# Altium PCB PCB1.PcbDoc
Units mil, origin at the board's own origin, x right, y up, seen from the top; angles counter-clockwise.
Board outline 4433.75 x 2440 mil, 2 copper layers (Top Layer, Bottom Layer); 83 components, 118 nets, 440 pads, 174 vias.
Unrouted connection lines stored in the file: 1.
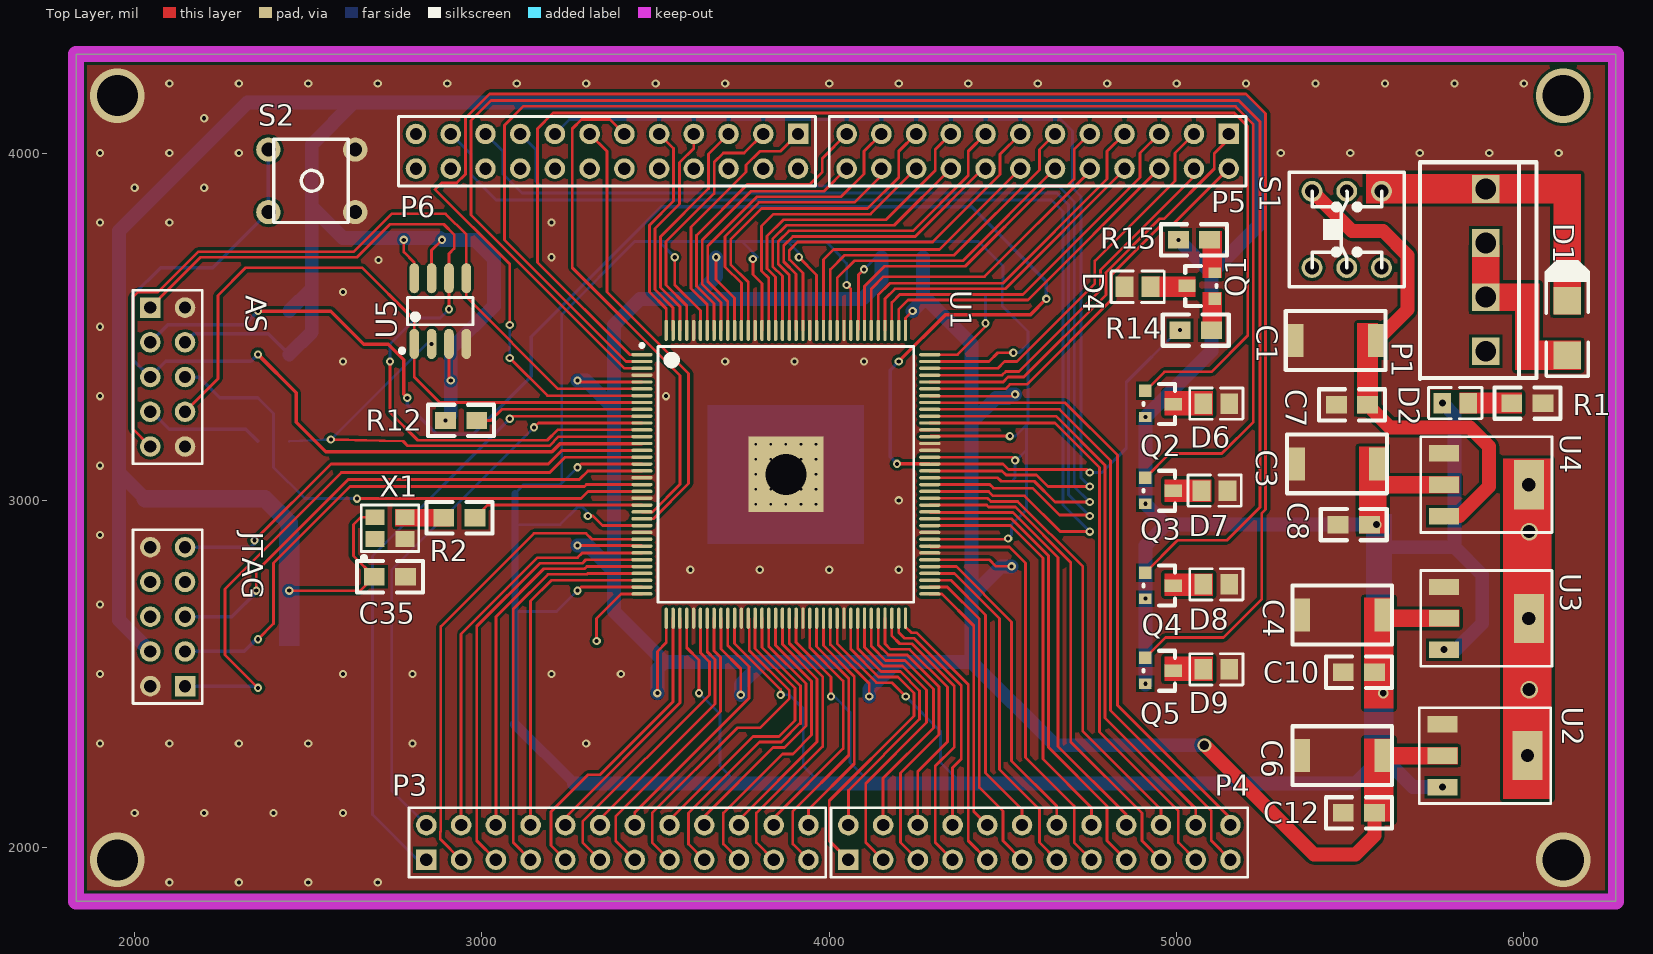
[diagram p0: Top Layer view]
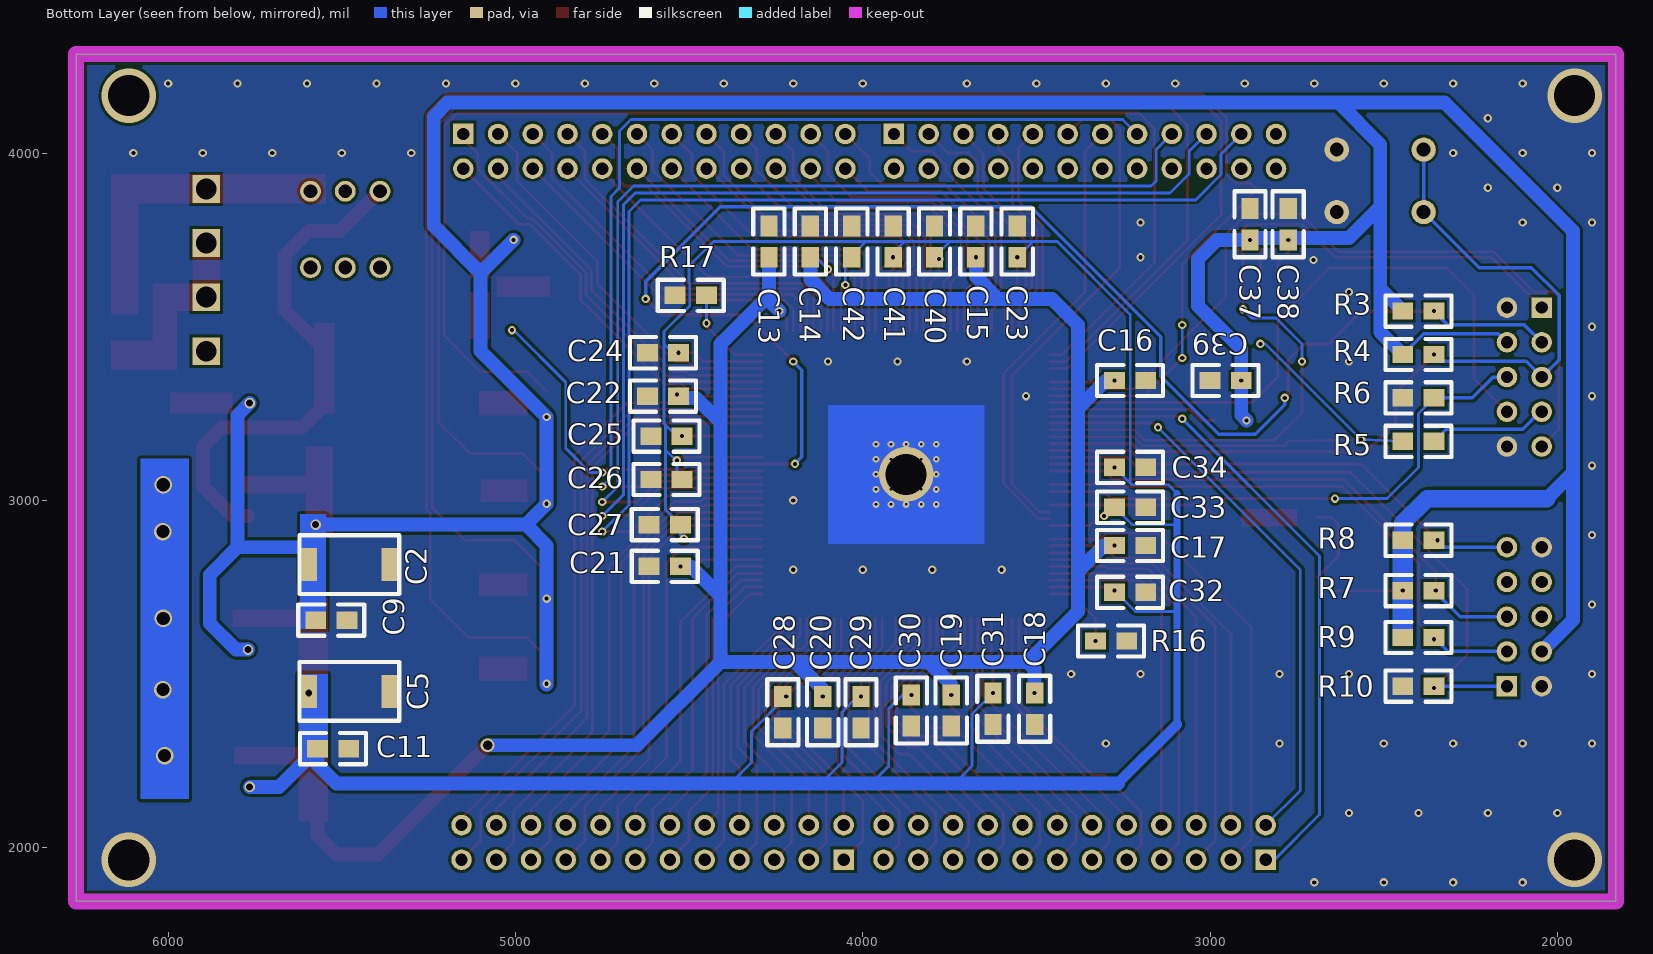
[diagram p1: Bottom Layer view, seen from below]

## Layer stack, top to bottom
Top Solder: solder mask 0.4, Solder Resist, Dk 3.5
Top Layer: signal copper 1.4
Dielectric 1: dielectric 12.6, FR-4, Dk 4.8
Bottom Layer: signal copper 1.4
Bottom Solder: solder mask 0.4, Solder Resist, Dk 3.5

## Board outline
1831.25,1845 1831.25,4285 6265,4285 6265,1845

## Design rules (kind name [scope] priority, off if disabled: settings)
Clearance [All] p1: gap=8
PlaneConnect [All] p1: planeconnectstyle=Direct reliefexpansion=20 reliefentries=4 reliefconductorwidth=10 reliefairgap=10
PolygonConnect [All] p1: connectstyle=Direct reliefconductorwidth=10 reliefentries=4 polygonreliefangle="90 Angle" airgapwidth=10
RoutingVias [All] p1: holewidth=28 width=50 viastyle="Through Hole" minholewidth=28 minwidth=50 maxholewidth=28 maxwidth=50
SolderMaskExpansion [All] p1: expansion=4
Width [All] p1: maxlimit=50 minlimit=8 preferedwidth=10
29 further rules are at their usual default settings.

## Components (designator, comment, footprint, x,y, rotation, side; value= is the part's Value field where it differs from the comment)
AS "Header 5X2" HDR2X5 2045,3555 r270 top
C1 "Cap" "7343-31 TYPE D" 5601.81,3544.65 r180 top
C2 "Cap" "7343-31 TYPE D" 5621.81,2730.35 r180 bottom
C3 "Cap" "7343-31 TYPE D" 5605.59,3189.65 r180 top
C4 "Cap" "7343-31 TYPE D" 5620.59,2754.65 r180 top
C5 "Cap" "7343-31 TYPE D" 5621.81,2365.35 r180 bottom
C6 "Cap" "7343-31 TYPE D" 5620.59,2349.65 r180 top
C7 "0.1uf" 0805 5460,3275 r0 top
C8 "0.1uf" 0805 5465,2930 r0 top
C9 "0.1uf" 0805 5485,2655 r0 bottom
C10 "0.1uf" 0805 5480,2505 r0 top
C11 "0.1uf" 0805 5480,2285 r0 bottom
C12 "0.1uf" 0805 5480,2100 r0 top
C13 "0.1uf" 0805 4270,3790 r270 bottom
C14 "0.1uf" 0805 4150.83,3790 r270 bottom
C15 "0.1uf" 0805 3674.17,3790 r270 bottom
C16 "0.1uf" 0805 3185,3345 r0 bottom
C17 "0.1uf" 0805 3185,2870 r0 bottom
C18 "0.1uf" 0805 3505,2355 r90 bottom
C19 "0.1uf" 0805 3745,2350 r90 bottom
C20 "0.1uf" 0805 4115,2345 r90 bottom
C21 "0.1uf" 0805 4615,2810 r180 bottom
C22 "0.1uf" 0805 4620,3300 r180 bottom
C23 "0.1uf" 0805 3555,3790 r270 bottom
C24 "0.1uf" 0805 4620,3425 r180 bottom
C25 "0.1uf" 0805 4610,3185 r180 bottom
C26 "0.1uf" 0805 4610,3060 r180 bottom
C27 "0.1uf" 0805 4615,2930 r180 bottom
C28 "0.1uf" 0805 4230,2345 r90 bottom
C29 "0.1uf" 0805 4005,2345 r90 bottom
C30 "0.1uf" 0805 3860,2350 r90 bottom
C31 "0.1uf" 0805 3625,2355 r90 bottom
C32 "0.1uf" 0805 3185,2735 r0 bottom
C33 "0.1uf" 0805 3185,2980 r0 bottom
C34 "0.1uf" 0805 3185,3095 r0 bottom
C35 "104" 0805 2780,2780 r180 top
C37 "104" 0805 2885,3750 r90 bottom
C38 "104" 0805 2775,3840 r270 bottom
C39 "104" 0805 2910,3345 r0 bottom
C40 "0.1uf" 0805 3793.33,3790 r270 bottom
C41 "0.1uf" 0805 3912.5,3790 r270 bottom
C42 "0.1uf" 0805 4031.67,3790 r270 bottom
D1 "5.6V" SMA/DO-214AC 6125,3417.52 r90 top
D2 "LED" 0805_s 5823.07,3293.78 r0 top
D4 "LED" 0805_s 4866.93,3601.22 r180 top
D6 "LED" 0805_s 5135,3292 r0 top
D7 "LED" 0805_s 5130,3042 r0 top
D8 "LED" 0805_s 5135,2772 r0 top
D9 "LED" 0805_s 5135,2527 r0 top
JTAG "Header 5X2" HDR2X5 2145,2465 r90 top
P1 "VH3.96-4A" VH3.96-4P 6035.67,3973.58 r270 top
P3 "Header 12X2" HDR2X12 2840,1965 r0 top
P4 "Header 12X2" HDR2X12 4055,1965 r0 top
P5 "Header 12X2" HDR2X12 5150,4055 r180 top
P6 "Header 12X2" HDR2X12 3910,4055 r180 top
Q1 "SI2301" SOT-23 4989.72,3532.24 r90 top
Q2 "SI2301" SOT-23 5030.28,3362.76 r270 top
Q3 "SI2301" SOT-23 5030.28,3112.76 r270 top
Q4 "SI2301" SOT-23 5030.28,2839.76 r270 top
Q5 "SI2301" SOT-23 5030.28,2594.76 r270 top
R1 "1K" 0805 6055,3280 r180 top
R2 "30R" 0805 2890,2950 r0 top
R3 "10K" 0805 2445,3545 r180 bottom
R4 "10K" 0805 2445,3420 r180 bottom
R5 "20R" 0805 2445,3170 r180 bottom
R6 "20R" 0805 2445,3295 r180 bottom
R7 "10K" 0805 2355,2740 r0 bottom
R8 "10K" 0805 2355,2885 r0 bottom
R9 "10K" 0805 2355,2605 r0 bottom
R10 "10K" 0805 2355,2465 r0 bottom
R12 "10K" 0805 2985,3230 r180 top
R14 "10K" 0805 5010,3490 r0 top
R15 "1K" 0805 5095,3750 r180 top
R16 "0" 0805 3240,2595 r0 bottom
R17 "0" 0805 4540,3590 r180 bottom
S1 "自锁开关" AN88 5490,3780 r90 top
S2 "6x6开关" AN66 2510,3920 r270 top
U1 "FPGA-ALEP4C-EP4CE10-E144" EQFP144_A-165_D2-54_L 3875,3075 r0 top
U2 "AMS1117-1.2V" SOT223 5765.9,2355.55 r270 top
U3 "AMS1117-2.5V" SOT223 5770,2750.55 r270 top
U4 "AMS1117-3.3V" SOT223 5770,3135.55 r270 top
U5 "W25Q64" LC-SOIC-8_150mil 2880,3545 r0 top
X1 "XAL" XAL-SMD-3225_4P 2735,2920 r0 top

## Footprints (in the part's own frame and the unit in brackets; to place one, negate y for a bottom-side part, rotate by r counter-clockwise, add the part's x,y. Pads: shape width x height; smd on the part's side, far side on the other; paste and mask are expansions set on the pad)
0805 [mil]
  rect 60x50 smd: 1(0,0) 2(90,0)
  silkscreen extent -50,-45 140,45
0805_s [mm]
  rect 1.3x1.499 smd: 1(0.425,-0.35) 2(-1.475,-0.35)
  silkscreen extent -2.47,-1.49 1.43,0.79
"7343-31 TYPE D" [mm]
  rect 1.3x2.4 smd: 1(0.65,2.15) 2(6.65,2.15)
  silkscreen extent 0,0 7.3,4.3
AN66 [mil]
  round 70 hole 40: 1(-90,125) 1(90,125) 2(-90,-125) 2(90,-125)
  silkscreen extent -120,-110 120,105
AN88 [mil]
  round 60 hole 40: 1(-110,100) 2(-110,0) 3(-110,-100) 4(110,-100) 5(110,0) 6(110,100)
  silkscreen extent -165,-165 165,165
EQFP144_A-165_D2-54_L [mm] "Shrink QFP, 144-Leads, Body 20x20mm, Pitch 0.5mm, Thermal Pad 5.55x5.55mm, IPC High Density"
  oval 1.55x0.25 smd: 1(-10.525,8.75) 2(-10.525,8.25) 3(-10.525,7.75) 4(-10.525,7.25) 5(-10.525,6.75) 6(-10.525,6.25) 7(-10.525,5.75) 8(-10.525,5.25) 9(-10.525,4.75) 10(-10.525,4.25) 11(-10.525,3.75) 12(-10.525,3.25) 13(-10.525,2.75) 14(-10.525,2.25) 15(-10.525,1.75) 16(-10.525,1.25) 17(-10.525,0.75) 18(-10.525,0.25) 19(-10.525,-0.25) 20(-10.525,-0.75) 21(-10.525,-1.25) 22(-10.525,-1.75) 23(-10.525,-2.25) 24(-10.525,-2.75) 25(-10.525,-3.25) 26(-10.525,-3.75) 27(-10.525,-4.25) 28(-10.525,-4.75) 29(-10.525,-5.25) 30(-10.525,-5.75) 31(-10.525,-6.25) 32(-10.525,-6.75) 33(-10.525,-7.25) 34(-10.525,-7.75) 35(-10.525,-8.25) 36(-10.525,-8.75) 73(10.525,-8.75) 74(10.525,-8.25) 75(10.525,-7.75) 76(10.525,-7.25) 77(10.525,-6.75) 78(10.525,-6.25) 79(10.525,-5.75) 80(10.525,-5.25) 81(10.525,-4.75) 82(10.525,-4.25) 83(10.525,-3.75) 84(10.525,-3.25) 85(10.525,-2.75) 86(10.525,-2.25) 87(10.525,-1.75) 88(10.525,-1.25) 89(10.525,-0.75) 90(10.525,-0.25) 91(10.525,0.25) 92(10.525,0.75) 93(10.525,1.25) 94(10.525,1.75) 95(10.525,2.25) 96(10.525,2.75) 97(10.525,3.25) 98(10.525,3.75) 99(10.525,4.25) 100(10.525,4.75) 101(10.525,5.25) 102(10.525,5.75) 103(10.525,6.25) 104(10.525,6.75) 105(10.525,7.25) 106(10.525,7.75) 107(10.525,8.25) 108(10.525,8.75)
  oval 0.25x1.55 smd: 37(-8.75,-10.525) 38(-8.25,-10.525) 39(-7.75,-10.525) 40(-7.25,-10.525) 41(-6.75,-10.525) 42(-6.25,-10.525) 43(-5.75,-10.525) 44(-5.25,-10.525) 45(-4.75,-10.525) 46(-4.25,-10.525) 47(-3.75,-10.525) 48(-3.25,-10.525) 49(-2.75,-10.525) 50(-2.25,-10.525) 51(-1.75,-10.525) 52(-1.25,-10.525) 53(-0.75,-10.525) 54(-0.25,-10.525) 55(0.25,-10.525) 56(0.75,-10.525) 57(1.25,-10.525) 58(1.75,-10.525) 59(2.25,-10.525) 60(2.75,-10.525) 61(3.25,-10.525) 62(3.75,-10.525) 63(4.25,-10.525) 64(4.75,-10.525) 65(5.25,-10.525) 66(5.75,-10.525) 67(6.25,-10.525) 68(6.75,-10.525) 69(7.25,-10.525) 70(7.75,-10.525) 71(8.25,-10.525) 72(8.75,-10.525) 109(8.75,10.525) 110(8.25,10.525) 111(7.75,10.525) 112(7.25,10.525) 113(6.75,10.525) 114(6.25,10.525) 115(5.75,10.525) 116(5.25,10.525) 117(4.75,10.525) 118(4.25,10.525) 119(3.75,10.525) 120(3.25,10.525) 121(2.75,10.525) 122(2.25,10.525) 123(1.75,10.525) 124(1.25,10.525) 125(0.75,10.525) 126(0.25,10.525) 127(-0.25,10.525) 128(-0.75,10.525) 129(-1.25,10.525) 130(-1.75,10.525) 131(-2.25,10.525) 132(-2.75,10.525) 133(-3.25,10.525) 134(-3.75,10.525) 135(-4.25,10.525) 136(-4.75,10.525) 137(-5.25,10.525) 138(-5.75,10.525) 139(-6.25,10.525) 140(-6.75,10.525) 141(-7.25,10.525) 142(-7.75,10.525) 143(-8.25,10.525) 144(-8.75,10.525)
  rect 5.5x5.5 smd: 145(0,0)
  silkscreen extent -10.65,-9.35 9.35,9.55, body extent -10,-10 10,10, height 1.65
HDR2X5 [mm] "Connector; Header; 5x2 Position"
  rect 1.5x1.5 hole 0.9: 1(0,0)
  round 1.5 hole 0.9: 2(0,2.54) 3(2.54,0) 4(2.54,2.54) 5(5.08,0) 6(5.08,2.54) 7(7.62,0) 8(7.62,2.54) 9(10.16,0) 10(10.16,2.54)
  silkscreen extent -1.27,-1.27 11.43,3.81
HDR2X12 [mm] "Connector; Header; 12x2 Position"
  rect 1.5x1.5 hole 0.9: 1(0,0)
  round 1.5 hole 0.9: 2(0,2.54) 3(2.54,0) 4(2.54,2.54) 5(5.08,0) 6(5.08,2.54) 7(7.62,0) 8(7.62,2.54) 9(10.16,0) 10(10.16,2.54) 11(12.7,0) 12(12.7,2.54) 13(15.24,0) 14(15.24,2.54) 15(17.78,0) 16(17.78,2.54) 17(20.32,0) 18(20.32,2.54) 19(22.86,0) 20(22.86,2.54) 21(25.4,0) 22(25.4,2.54) 23(27.94,0) 24(27.94,2.54)
  silkscreen extent -1.27,-1.27 29.21,3.81
LC-SOIC-8_150mil [mm]
  oval 0.7x2.2 smd: 1(-1.905,-2.4) 2(-0.635,-2.4) 3(0.635,-2.4) 4(1.905,-2.4) 5(1.905,2.4) 6(0.635,2.4) 7(-0.635,2.4) 8(-1.905,2.4)
  silkscreen extent -2.95,-3.05 2.4,1
SMA/DO-214AC [mm]
  rect 2x2 smd: 1(0,0) 2(4,0)
  silkscreen extent -1.52,-1.52 6.86,1.55
SOT223 [mm]
  rect 1.2x2.2 smd: 1(0,0) 2(2.3,0) 3(4.6,0)
  rect 3.6x2.2 smd: 4(2.3,6.2)
  silkscreen extent -1.2,-1.7 5.8,7.9
SOT-23 [mil]
  rect 36x36 smd: 1(47.76,-120.28)
  rect 30x36 smd: 2(122.76,-120.28)
  rect 36x50 smd: 3(85.76,-40.28)
  silkscreen extent 28,-125 143,-35
VH3.96-4P [mil]
  rect 80x80 hole 60: 1(76.77,-145.67) 2(232.68,-145.67) 3(388.58,-145.67) 4(544.49,-145.67)
  silkscreen extent 0,-335 625,0
XAL-SMD-3225_4P [mm]
  rect 1.4x1.15 smd: 1(-1.1,-0.8) 2(1.1,-0.8) 3(1.1,0.8) 4(-1.1,0.8)
  silkscreen extent -2.1,-2.35 2.1,1.7, body extent -1.6,-1.25 1.6,1.25, height 0.61

## Part data
AS JTAG: "Header, 5-Pin, Dual row"
C1 C2 C3 C4 C5 C6: library part "Tantalium Cap"
C7 C8 C9 C10 C11 C12 C13 C14 C15 C16 C17 C18 C19 C20 C21 C22 C23 C24 C25 C26 C27 C28 C29 C30 C31 C32 C33 C34 C35 C37 C38 C39 C40 C41 C42: library part Cap
D1: library part 肖特基-5.6V
P3 P4 P5 P6: "Header, 12-Pin, Dual row"
R1 R2 R3 R4 R5 R6 R7 R8 R9 R10 R12 R14 R15 R16 R17: library part Res

## Via types
v1: diameter 24, hole 12, Top Layer to Bottom Layer, 133 vias
v2: diameter 19.68, hole 7.87, Top Layer to Bottom Layer, 25 vias
v3: diameter 50, hole 38, Top Layer to Bottom Layer, 5 vias
v4: diameter 157.48, hole 118.11, Top Layer to Bottom Layer, 5 vias
v5: diameter 30, hole 20, Top Layer to Bottom Layer, 5 vias
v6: diameter 40, hole 28, Top Layer to Bottom Layer, 1 vias

## Nets (pads, with @x,y where several pads share a name; then routed paths per layer and width w, separated by ;. In a path a pad name is that pad's centre, name@x,y a point inside that pad or via, vN(x,y) a via of type N, cw(c..) or ccw(c..) an arc to the next point about the centre after c; other vN are vias at no path point)
1.2V: C6.1 C12.2 C13.2 C14.2 C15.2 C16.2 C17.2 C18.2 C19.2 C20.2 C21.2 C22.2 U1.5 U1.29 U1.37 U1.45 U1.61 U1.78 U1.102 U1.109 U1.116 U1.134 U2.2 | length 8798.1
  Top Layer w8: v1(3275,2870) 3458.94,2870 U1.29 ; v1(3275,3345) 3279.25,3340.75 U1.5 ; v1(3505,2445) 3505,2565 3530.51,2590.51 U1.37 ; v1(3674.17,3700) 3674.17,3635.83 3727.36,3582.64 U1.134 ; U1.45 3687.99,2572.01 3745,2515 v1(3745,2440) ; U1.61 4002.95,2584.93 4115,2472.88 v1(4115,2435) ; U1.116 4084.46,3492.13 4084.46,3649.46 v1(4100,3665) ; U1.109 4219.49,3524.49 v1(4240,3545) ; U1.78 4461.06,2828.94 4480,2810 v1(4525,2810) ; U1.102 4290.75,3300 4530,3300 v1(4535,3305)
  Top Layer w40: v6(5080,2295) 5395,1980 5515,1980 5570,2035 C12.2
  Bottom Layer w8: v1(4100,3665) 4135,3700 C14.2
  Bottom Layer w40: v1(3275,2870) 3305,2870 3380,2795 ; v1(3275,3345) 3300,3345 3380,3265 ; v1(3505,2445) 3505,2515 3525,2535 ; v1(3674.17,3700) 3674.17,3644.17 3610,3580 ; v1(3745,2440) 3745,2470 3810,2535 ; v1(4115,2435) 4115,2455 4195,2535 ; C14.2 4150.83,3635.83 4095,3580 3610,3580 ; v1(4240,3545) 4270,3575 4270,3590 ; C13.2 4270,3590 ; v1(4525,2810) 4495,2810 4410,2725 ; v1(4535,3305) 4525,3305 4515,3295 4480,3295 4410,3225 ; v6(5080,2295) 4650,2295 4410,2535 ; 3380,2795 3380,3265 ; 3380,2795 3380,2680 3525,2535 ; 3380,3265 3380,3505 3455,3580 3610,3580 ; 3525,2535 3810,2535 ; 3810,2535 4195,2535 ; 4195,2535 4410,2535 ; 4270,3590 4410,3450 4410,3225 ; 4410,2535 4410,2725 ; 4410,2725 4410,3225
2.5V: C4.1 C5.1 C10.2 C11.2 C23.2 C24.2 C25.2 C26.2 C27.2 C28.2 C29.2 C30.2 C31.2 C32.2 C33.2 C34.2 C40.2 C41.2 C42.2 U1.17 U1.26 U1.35 U1.40 U1.47 U1.56 U1.62 U1.81 U1.93 U1.96 U1.107 U1.117 U1.122 U1.130 U1.139 U2.3 U3.2 | length 12127.9
  Top Layer w8: v1(3275,2740) 3285.2,2750.2 U1.35 ; v1(3275,3095) 3285,3105 3460.16,3105 U1.17 ; v1(3305,2955) 3319.72,2955 3347.36,2927.36 U1.26 ; v1(3555,3700) 3555,3620 3628.94,3546.06 U1.139 ; U1.40 3589.57,2575.43 3625,2540 v1(3625,2445) ; U1.47 3727.36,2587.64 3860,2455 v1(3860,2440) ; v1(3780,3695) 3780,3650 3806.1,3623.9 U1.130 ; U1.56 3904.53,2591.49 4005,2491.02 v1(4005,2435) ; v1(3912.5,3700) 3963.58,3648.92 U1.122 ; U1.62 4022.64,2587.87 4135.51,2475 4180,2475 v1(4220,2435) ; v1(4050,3620) 4062.01,3607.99 U1.117 ; U1.81 4512.99,2887.99 4510.98,2890 v1(4515,2890) ; U1.93 4525.79,3124.21 v1(4535,3115) ; U1.96 4291.1,3185 v1(4520,3185) ; U1.107 4459.8,3399.8 4485,3425 v1(4530,3425)
  Bottom Layer w8: 3095,2680 3215,2680 v1(3275,2740) ; 3095,2930 3225,2930 C33.2 3290,2980 3305,2965 v1(3305,2955) ; 3095,3020 3120,3045 3225,3045 3230,3050 ; v1(3275,3095) 3230,3050 ; v1(3555,3700) 3510,3745 ; v1(3625,2445) 3685,2385 3685,2235 3735,2185 ; C40.2 3748.33,3745 ; v1(3860,2440) 3885,2440 3925,2400 3925,2235 3975,2185 ; v1(3912.5,3700) 3912.5,3712.5 3880,3745 ; v1(4005,2435) 4015,2435 4060,2390 4060,2245 4120,2185 ; v1(4050,3620) 4050,3681.67 C42.2 4031.67,3703.33 3990,3745 ; v1(4220,2435) 4320,2335 4320,2245 4380,2185 ; v1(4515,2890) 4525,2900 C27.2 4568,2973 4568,3145 ; v1(4520,3185) 4536.03,3185 4568,3216.97 ; C26.2@4530,3060 4535,3065 v1(4535,3115) 4538,3115 4568,3145 ; v1(4530,3425) 4547,3425 4572,3450 ; 3230,3050 3230,3535 3440,3745 3510,3745 ; 3510,3745 3748.33,3745 ; 3748.33,3745 3880,3745 ; 3880,3745 3990,3745 ; 3990,3745 4430,3745 4500,3675 4500,3623.97 4498,3621.97 4498,3560.03 4572,3486.03 4572,3450 ; 4568,3145 4568,3216.97 ; 4568,3216.97 4572,3220.97 4572,3450
  Bottom Layer w20: 3095,2355 3095,2680 3095,2930 3095,3020
  Bottom Layer w30: 3095,2355 3265,2185
  Bottom Layer w40: 3265,2185 3735,2185 3975,2185 4120,2185 4380,2185 5515,2185 5570,2240 C11.2 5680,2175 v5(5765,2175)
  other v5: 5595,2445
3.3V: AS.4 C2.1 C3.1 C8.2 C9.2 C35.2 C37.1 C38.2 C39.1 D2.2 JTAG.4 Q2.2 Q3.2 Q4.2 Q5.2 R3.1 R4.1 R7.2 R8.2 R9.2 R12.2 R15.2 U3.3 U4.2 U5.3 U5.7 U5.8 X1.4 | length 12098.9
  Top Layer w8: v1(2445,2740) 2650,2740 C35.2 2630,2840 2630,2930 2651.5,2951.5 X1.4 ; v1(2775,3750) 2775,3715 2805,3685 U5.8 ; U5.7 2855,3720 v1(2885,3750) ; U5.3 2905,3350 v1(2910,3345)
  Bottom Layer w10: AS.4 2170,3480 2385,3480 R4.1
  Bottom Layer w40: 2030,3005 1955,3080 ; JTAG.4 1955,2655 1955,3080 ; R4.1 2510,3485 2510,3610 ; R3.1 2510,3610 ; v1(2895,3230) 2910,3245 v1(2910,3345) 2910,3435 3035,3560 3035,3695 2980,3750 v1(2885,3750) 2880,3755 2600,3755 2510,3845 ; v1@4910,2470 v1(4910,2472) v1(4910,2717) 4910,2870 4970,2930 ; v1(5005,3750) 5100,3655 ; v5(5575,2930) 4970,2930 ; 5580,2865 5800,2865 ; v5(5765,3280) 5800,3245 5800,2865 ; v5(5770,2570) 5805,2570 5880,2645 5880,2785 5800,2865 ; 1955,3080 1955,3775 2325,4145 2630,4145 ; 2510,3610 2510,3845 ; 2510,3845 2510,4025 2630,4145 ; 2630,4145 5195,4145 5235,4105 5235,3790 5100,3655 ; 4970,2930 v1(4910,2990) v1(4910,3240) 5100,3430 5100,3655
  Bottom Layer w50: 2030,3005 2375,3005 2445,2935 R8.2
10: P3.1 U1.10 | length 1896.1
  Top Layer w8: v1(3080,3235) 3087.32,3242.32 U1.10
  Bottom Layer w8: P3.1 2815,1965 2685,2095 2685,2840 v1(3080,3235)
11: P3.2 U1.11 | length 1672.1
  Top Layer w8: v1(3150,3210) 3162.64,3222.64 U1.11
  Bottom Layer w8: P3.2 2740,2165 2740,2800 v1(3150,3210)
28: P3.3 U1.28 | length 1394.4
  Top Layer w8: P3.3 2880,2025 2880,2044.74 2881.53,2046.27 2881.53,2636.53 3150,2905 3300,2905 3317.01,2887.99 U1.28
30: P3.4 U1.30 | length 1167.4
  Top Layer w8: P3.4 2940,2615 3160,2835 3275,2835 3288.62,2848.62 U1.30
31: P3.5 U1.31 | length 1250.1
  Top Layer w8: P3.5 2985,2020 2985,2637.37 3166.63,2819 3289,2819 3298.94,2828.94 U1.31
32: P3.6 U1.32 | length 1080.4
  Top Layer w8: P3.6 3040,2665 3178,2803 3295.63,2803 3301.88,2809.25 U1.32
33: P3.7 U1.33 | length 1155.8
  Top Layer w8: P3.7 3090,2015 3090,2687 3190,2787 3302.25,2787 3304.82,2789.57 U1.33
34: P3.8 U1.34 | length 990.4
  Top Layer w8: P3.8 3140,2710 3199.88,2769.88 U1.34
38: P3.9 U1.38 | length 879
  Top Layer w8: P3.9 3198.47,2006.53 3198.47,2103.47 3305,2210 3340,2210 3550.2,2420.2 U1.38
39: P3.10 U1.39 | length 732.3
  Top Layer w8: P3.10 3240,2087.37 3569.88,2417.25 U1.39
42: P3.11 U1.42 | length 878.3
  Top Layer w8: P3.11 3290,2015 3290,2075 3655,2440 3655,2535 3628.94,2561.06 U1.42
43: P3.12 U1.43 | length 742
  Top Layer w8: P3.12 3340,2082.37 3671,2413.37 3671,2541.63 3648.62,2564.01 U1.43
44: P3.13 U1.44 | length 851.2
  Top Layer w8: P3.13 3385,2020 3385,2090 3687,2392 3687,2548.25 3668.31,2566.95 U1.44
46: P3.14 U1.46 | length 758.1
  Top Layer w8: P3.14 3440,2101.06 3769,2430.06 3769,2519 3770,2520 3707.68,2582.32 U1.46
49: P3.15 U1.49 | length 967
  Top Layer w8: P3.15 3490,2015 3490,2100 3735,2345 3800,2345 3885,2430 3885,2452.63 3769.5,2568.13 3769.5,2657.87 U1.49
50: P3.16 U1.50 | length 836.6
  Top Layer w8: P3.16 3540,2080 3780,2320 3855,2320 3901,2366 3901,2459.25 3786.42,2573.84 U1.50
51: P3.17 U1.51 | length 931.7
  Top Layer w8: P3.17 3595,2010 3595,2100 3799,2304 3861.63,2304 3914.63,2357 3917,2357 3917,2465.88 3806.1,2576.78 U1.51
52: P3.18 U1.52 | length 780.5
  Top Layer w8: P3.18 3640,2090 3838,2288 3870.63,2288 3933,2350.37 3933,2472.51 3825.79,2579.72 U1.52
53: P3.19 U1.53 | length 879.9
  Top Layer w8: P3.19 3695,2010 3695,2100 3865,2270 3895,2270 3949,2324 3949,2479.14 3845.47,2582.66 U1.53
54: P3.20 U1.54 | length 730.2
  Top Layer w8: P3.20 3740,2080 3965,2305 3965,2485.76 3865.16,2585.61 U1.54
55: P3.21 U1.55 | length 835.3
  Top Layer w8: P3.21 3790,2015 3790,2100 3981,2291 3981,2492.39 3884.84,2588.55 U1.55
58: P3.22 U1.58 | length 718.3
  Top Layer w8: P3.22 3840,2085 4040,2285 4040,2480 3943.9,2576.1 U1.58
59: P3.23 U1.59 | length 819.2
  Top Layer w8: P3.23 3895,2010 3895,2105 4056,2266 4056,2486.63 3963.58,2579.05 U1.59
60: P3.24 U1.60 | length 687.1
  Top Layer w8: P3.24 3940,2109.75 4072,2241.75 4072,2493.25 3983.27,2581.99 U1.60
64: P4.1 U1.64 | length 927.6
  Top Layer w8: P4.1 4000,2020 4000,2135 4244,2379 4244,2444.94 4197.94,2491 4142.14,2491 4062.01,2571.13 U1.64
65: P4.2 U1.65 | length 787.1
  Top Layer w8: P4.2 4055,2165 4260,2370 4260,2451.57 4204.57,2507 4148.76,2507 4081.69,2574.07 U1.65
66: P4.3 U1.66 | length 895.5
  Top Layer w8: U1.66 4101.38,2577.01 4155.39,2523 4211.2,2523 4280,2454.2 4280,2360 4105,2185 4105,2015 P4.3
67: P4.4 U1.67 | length 762.5
  Top Layer w8: U1.67 4121.06,2579.96 4162.02,2539 4217.82,2539 4300,2456.82 4300,2345 4155,2200 P4.4
68: P4.5 U1.68 | length 866.8
  Top Layer w8: U1.68 4140.75,2584.25 4170,2555 4224.45,2555 4316,2463.45 4316,2326 4205,2215 4205,2015 P4.5
69: P4.6 U1.69 | length 737.1
  Top Layer w8: U1.69 4160.43,2587.19 4176.63,2571 4231.08,2571 4340,2462.08 4340,2305 4255,2220 P4.6
70: P4.7 U1.70 | length 834
  Top Layer w8: U1.70 4180.12,2609.88 4203,2587 4237.71,2587 4360,2464.71 4360,2290 4305,2235 4305,2015 P4.7
71: P4.8 U1.71 | length 696.6
  Top Layer w8: U1.71 4199.8,2620.2 4217,2603 4244.33,2603 4380,2467.33 4380,2255 4355,2230 P4.8
72: P4.9 U1.72 | length 801.9
  Top Layer w8: U1.72 4219.49,2635.51 4236,2619 4250.96,2619 4400,2469.96 4400,2020 P4.9
73: P4.10 U1.73 | length 754.7
  Top Layer w8: U1.73 4324.49,2730.51 4416,2639 4416,2104 P4.10
74: P4.11 U1.74 | length 924.8
  Top Layer w8: U1.74 4339.8,2750.2 4432,2658 4432,2173 4500,2105 4500,2020 P4.11
75: P4.12 U1.75 | length 850.5
  Top Layer w8: U1.75 4350.12,2769.88 4450,2670 4450,2215 4555,2110 P4.12
76: P4.13 U1.76 | length 1017.6
  Top Layer w8: U1.76 4360.43,2789.57 4490,2660 4490,2225 4605,2110 4605,2015 P4.13
77: P4.14 U1.77 | length 940.4
  Top Layer w8: U1.77 4365.75,2809.25 4525,2650 4525,2250 4655,2120 P4.14
80: P4.15 U1.80 | length 1229.3
  Top Layer w8: U1.80 4291.68,2866 4519,2866 4565,2820 4565,2260 4705,2120 4705,2015 P4.15
83: P4.16 U1.83 | length 1191.3
  Top Layer w8: U1.83 4521.58,2927.36 4615,2833.94 4615,2255 4755,2115 P4.16
84: P4.17 U1.84 | length 1354.1
  Top Layer w8: U1.84 4524.52,2947.05 4631,2840.57 4631,2289.25 4800,2120.25 4800,2020 P4.17
85: P4.18 U1.85 | length 1275.5
  Top Layer w8: U1.85 4291.1,2965 4529.2,2965 4658.63,2835.57 4658.63,2291.37 4855,2095 P4.18
86: P4.19 U1.86 | length 1438.3
  Top Layer w8: U1.86 4453.07,2986.42 4458.49,2981 4535.82,2981 4695,2821.82 4695,2305 4900,2100 4900,2020 P4.19
87: P4.20 U1.87 | length 1359.7
  Top Layer w8: U1.87 4456.02,3006.1 4465.12,2997 4542.45,2997 4730,2809.45 4730,2335 4955,2110 P4.20
98: P4.21 U1.98 | length 1785.9
  Top Layer w8: U1.98 4649.73,3222.64 4778,3094.37 4778,2333 5005,2106 5005,2015 P4.21
99: P4.22 U1.99 | length 1707.3
  Top Layer w8: U1.99 4652.68,3242.32 4794,3101 4794,2373 5055,2112 P4.22
100: P4.23 U1.100 | length 1874.4
  Top Layer w8: U1.100 4662.99,3262.01 4810,3115 4810,2395 5100,2105 5100,2020 P4.23
101: P4.24 U1.101 | length 1807.2
  Top Layer w8: U1.101 4290.06,3281 4679,3281 4830,3130 4830,2410 5150,2090 5150,2080 P4.24@5135,2065
103: P5.2 U1.103 | length 1165.3
  Top Layer w8: U1.103 4507.12,3321.06 4520.06,3334 4569,3334 4812.6,3577.6 4812.6,3649.47 4958.13,3795 4990,3795 P5.2
104: P5.1 U1.104 | length 1228.7
  Top Layer w8: U1.104 4500.75,3340.75 4515,3355 4560,3355 4796.6,3591.6 4796.6,3656.1 4951.5,3811 4964.73,3811 5108.47,3954.74 5108.47,3998.47 5150,4040 P5.1
105: P5.4 U1.105 | length 1053.8
  Top Layer w8: U1.105 4497.81,3360.43 4508.37,3371 4546,3371 4780.6,3605.6 4780.6,3662.73 5050,3932.13 P5.4
106: P5.3 U1.106 | length 1125.1
  Top Layer w8: U1.106 4485.12,3380.12 4505,3400 4540,3400 4764.6,3624.6 4764.6,3689.6 4995,3920 4995,4000 P5.3
110: P5.6 U1.110 | length 978.5
  Top Layer w8: U1.110 4199.8,3549.8 4227,3577 4572,3577 P5.6
111: P5.5 U1.111 | length 1092.5
  Top Layer w8: U1.111 4180.12,3570.12 4203,3593 4558,3593 4895,3930 4895,4000 P5.5
112: P5.8 U1.112 | length 937.3
  Top Layer w8: U1.112 4160.43,3580.43 4189,3609 4506.63,3609 4850,3952.37 P5.8
113: P5.7 U1.113 | length 1049.8
  Top Layer w8: U1.113 4140.75,3590.75 4175,3625 4500,3625 4800,3925 4800,4005 P5.7
114: P5.10 U1.114 | length 896.5
  Top Layer w8: U1.114 4121.06,3609.2 4155.93,3644.07 4446.7,3644.07 4750,3947.37 P5.10
115: P5.9 U1.115 | length 1007.1
  Top Layer w8: U1.115 4101.38,3616.38 4159,3674 4391.63,3674 4622.63,3905 4685,3905 4705,3925 4705,4010 P5.9
119: P5.12 U1.119 | length 908.5
  Top Layer w8: U1.119 4022.64,3640 4072.64,3690 4385,3690 P5.12
120: P5.11 U1.120 | length 1018.3
  Top Layer w8: U1.120 4002.95,3664.42 4044.53,3706 4359.73,3706 4605,3951.27 4605,4010 P5.11
121: P5.14 U1.121 | length 879
  Top Layer w8: U1.121 3983.27,3693.27 4012,3722 4317,3722 P5.14
124: P5.13 U1.124 | length 1085
  Top Layer w8: U1.124 3924.21,3654.35 3885,3693.56 3885,3720 3909,3744 4297.73,3744 4491.53,3937.8 4491.53,3996.53 P5.13
125: P5.16 U1.125 | length 931.9
  Top Layer w8: U1.125 3904.53,3651.4 3869,3686.93 3869,3734 3895,3760 4247.63,3760 4442.63,3955 P5.16
126: P5.15 U1.126 | length 1035.4
  Top Layer w8: U1.126 3884.84,3648.46 3853,3680.3 3853,3745.37 3883.63,3776 4241,3776 4400,3935 4400,4005 P5.15
127: P5.18 U1.127 | length 871.4
  Top Layer w8: U1.127 3865.16,3645.52 3837,3673.68 3837,3752 3877,3792 4187,3792 P5.18
128: P5.17 U1.128 | length 967.7
  Top Layer w8: U1.128 3845.47,3642.58 3821,3667.05 3821,3761 3868,3808 4163,3808 4305,3950 4305,4010 P5.17
129: P5.20 U1.129 | length 822.6
  Top Layer w8: U1.129 3825.79,3639.63 3805,3660.42 3805,3790 3839,3824 4119,3824 P5.20
132: P5.19 U1.132 | length 986.5
  Top Layer w8: U1.132 3766.73,3628.27 3716,3679 3716,3751 3805,3840 4110,3840 4200,3930 4200,4005 P5.19
133: P5.22 U1.133 | length 832.6
  Top Layer w8: U1.133 3747.05,3625.32 3700,3672.37 3700,3760 3798,3858 4073,3858 4150,3935 P5.22
135: P5.21 U1.135 | length 938.8
  Top Layer w8: U1.135 3707.68,3572.32 3650,3630 3650,3732.63 3791.37,3874 4034,3874 4100,3940 4100,4005 P5.21
136: P5.24 U1.136 | length 783.3
  Top Layer w8: U1.136 3687.99,3569.38 3634,3623.37 3634,3749 3775,3890 3985,3890 P5.24
137: P5.23 U1.137 | length 870.9
  Top Layer w8: U1.137 3668.31,3566.44 3618,3616.75 3618,3763 3765,3910 3945,3910 3980,3945 3980,3985 P5.23
138: P6.1 U1.138 | length 747.7
  Top Layer w8: U1.138 3648.62,3563.5 3602,3610.12 3602,3787 3760,3945 3760,3965 3800,4005 3860,4005 P6.1
141: P6.3 U1.141 | length 741.4
  Top Layer w8: U1.141 3589.57,3560.43 3530,3620 3530,3745 3668.47,3883.47 3668.47,3973.47 3695,4000 3755,4000 P6.3
142: P6.5 U1.142 | length 670
  Top Layer w8: U1.142 3569.88,3557.49 3514,3613.37 3514,3759 3652.47,3897.47 3652.47,3997.47 P6.5
143: P6.7 U1.143 | length 633.6
  Top Layer w8: U1.143 3550.2,3554.55 3498,3606.75 3498,3783 3568.47,3853.47 3568.47,3972.2 3610,4013.73 P6.7
144: P6.9 U1.144 | length 631.7
  Top Layer w8: P6.9 3551.53,4013.47 3551.53,3861.53 3482,3792 3482,3600.12 3530.51,3551.61 U1.144
AGND: R16.2 R17.2 U1.36 U1.108 | length 508.8
  Top Layer w8: v1(3330,2595) 3330,2660 3400.51,2730.51 U1.36 ; U1.108 4369.49,3419.49 4450,3500 v1(4450,3510)
  Bottom Layer w8: v1(4450,3510) R17.2
ASDO: AS.9 U1.6 U5.5 | length 2330
  Top Layer w8: AS.9 1995,3205 1995,3585 2010,3600 2067.37,3600 2183.37,3716 2631,3716 2740,3825 2895,3825 2955,3765 U5.5 2955,3585 3219,3321 3460.57,3321 U1.6
CONF_DONE: AS.3 R3.2 R14.1 U1.92 | length 5221.5
  Top Layer w8: U1.92 4500.47,3104.53 4516,3089 4741,3089 v1(4750,3080)
  Top Layer w10: v1(2355,3545) 2565,3545 2660,3450 2730,3450 2775,3405 2775,3305 v1(2785,3295) ; v1(4195,3105) 4288.9,3105 U1.92 ; v1(4200,3400) 4335,3535 4580,3535 v1(4625,3580)
  Bottom Layer w8: v1@4760,3080 4785,3080 4855,3150 4855,3340 5005,3490 v1(5010,3490)
  Bottom Layer w10: AS.3 2095,3505 2315,3505 v1(2355,3545) ; v1(2785,3295) 2785,3275 2870,3190 2975,3190 3142,3357 3142,3471.04 3515.96,3845 4410,3845 4625,3630 v1(4625,3580) ; v1(4195,3105) 4175,3125 4175,3375 v1(4200,3400)
DATA0: R5.1 U1.13 U5.2 | length 1436.2
  Top Layer w8: v1(2565,3175) 2773.37,3170 2786.37,3157 3194.63,3157 3220.9,3183.27 U1.13
  Bottom Layer w8: R5.1 v1(2565,3175) 2840.51,3450.51 v1(2855,3450.51)
DCLK: AS.1 U1.12 U5.6 | length 2387.6
  Top Layer w8: AS.1 2190,3700 2640,3700 2735,3795 2890,3795 2920,3765 2920,3725 2905,3710 U5.6 v1(2905,3550) ; v1(2735,3400) 2735,3253 2815,3173 3188,3173 3217.95,3202.95 U1.12
  Bottom Layer w8: v1(2735,3400) 2735,3450 2810,3525 2880,3525 v1(2905,3550)
GND: AS.2 AS.10 C1.2 C2.2 C3.2 C4.2 C5.2 C6.2 C7.1 C8.1 C9.1 C10.1 C11.1 C12.1 C13.1 C14.1 C15.1 C16.1 C17.1 C18.1 C19.1 C20.1 C21.1 C22.1 C23.1 C24.1 C25.1 C26.1 C27.1 C28.1 C29.1 C30.1 C31.1 C32.1 C33.1 C34.1 C35.1 C37.2 C38.1 C39.2 C40.1 C41.1 C42.1 D4.1 D6.1 D7.1 D8.1 D9.1 JTAG.2 JTAG.10 R1.1 R6.1 R10.2 R16.1 R17.1 S2.1 U1.4 U1.19 U1.22 U1.27 U1.41 U1.48 U1.57 U1.63 U1.79 U1.82 U1.94 U1.95 U1.97 U1.118 U1.123 U1.131 U1.140 U1.145 U2.1 U3.1 U4.1 U5.4 X1.2
  other v1: 2100,1900 2300,1900 2500,1900 2700,1900 2000,2100 2200,2100 2400,2100 2600,2100 1900,2300 2100,2300 2300,2300 2500,2300 2800,2300 3300,2300 1900,2500 2600,2500 2800,2500 3200,2500 3400,2500 1900,2700 3600,2800 3800,2800 4000,2800 4200,2800 1900,2900 4200,3000 1900,3100 1900,3300 3530,3300 2600,3400 3700,3400 3900,3400 4100,3400 1900,3500 2600,3600 2702,3692 3200,3700 1900,3800 2100,3800 3200,3800 2000,3900 2200,3900 1900,4000 2100,4000 2300,4000 5300,4000 5500,4000 5700,4000 5900,4000 6100,4000 2200,4100 2100,4200 2300,4200 2500,4200 2700,4200 2900,4200 3100,4200 3300,4200 3500,4200 3700,4200 4000,4200 4200,4200 4400,4200 4600,4200 4800,4200 5000,4200 5200,4200 5400,4200 5600,4200 5800,4200 6000,4200
  other v2: 3788.39,2988.39 3831.69,2988.39 3875,2988.39 3918.31,2988.39 3961.61,2988.39 3788.39,3031.69 3831.69,3031.69 3875,3031.69 3918.31,3031.69 3961.61,3031.69 3788.39,3075 3831.69,3075 3875,3075 3918.31,3075 3961.61,3075 3788.39,3118.31 3831.69,3118.31 3875,3118.31 3918.31,3118.31 3961.61,3118.31 3788.39,3161.61 3831.69,3161.61 3875,3161.61 3918.31,3161.61 3961.61,3161.61
  other v4: 1950,1965 6113.26,1965 3875,3075 1950,4165
KEY1: P6.11 U1.24 | length 1472.6
  Top Layer w8: P6.11 3368.47,4096.53 3286.53,4096.53 3260,4070 3260,3669.64 3570,3359.64 3570,3046.27 3490.46,2966.73 U1.24
KEY2: P6.13 U1.25 | length 1300.9
  Top Layer w8: P6.13 3360,4005 3360,3600 3595,3365 3595,3048.64 3493.41,2947.05 U1.25
KEY3: P6.15 U1.91 | length 3044.4
  Top Layer w8: U1.91 4497.53,3084.84 4509.37,3073 4597,3073 4630,3040 v1(4750,3040)
  Bottom Layer w8: P6.15 3251.53,4096.53 4667.2,4096.53 4700,4063.73 4700,3900 4725,3875 4725,3065 v1(4750,3040)
KEY4: P6.17 U1.90 | length 3101.8
  Top Layer w8: U1.90 4484.84,3065.16 4495,3055 4590,3055 4650,2995 v1(4750,2995)
  Bottom Layer w8: P6.17 3155,4010 3155,3920 3170,3905 4660,3905 4705,3860 4705,3040 v1(4750,2995)
KEY5: P6.19 U1.89 | length 3220.9
  Top Layer w8: U1.89 4461.9,3045.47 4472.37,3035 4585,3035 4662.5,2957.5 4747.5,2957.5 v1(4750,2955)
  Bottom Layer w8: P6.19 3060,4005 3060,3940 3115,3885 4655,3885 4689,3851 4689,3016 v1(4750,2955)
KEY6: P6.21 U1.88 | length 3352.3
  Top Layer w8: U1.88 4458.96,3025.79 4471.75,3013 4562,3013 4665,2910 v1(4750,2910)
  Bottom Layer w8: P6.21 2968.47,3996.53 2968.47,3937.8 3041.27,3865 4640,3865 4673,3832 4673,2987 v1(4750,2910)
LED1: Q2.1 U1.1 | length 3837.7
  Top Layer w8: U1.1 3425.51,3419.49 3160,3685 3160,4070 3205,4115 5166.03,4115 5205,4076.03 5205,3475 5100,3370 4965,3370 Q2.1
LED2: Q3.1 U1.2 | length 4306.3
  Top Layer w8: U1.2 3415.2,3399.8 3065,3750 3065,4080 3120,4135 5170,4135 5170,4133.65 5221,4082.65 5221,3226 5130,3135 4980,3135 Q3.1
LED3: Q4.1 U1.3 | length 4785.6
  Top Layer w8: U1.3 3409.88,3380.12 2968.47,3821.53 2968.47,4093.73 3025.74,4151 5179,4151 5240,4090 5240,2980 5145,2885 5003,2885 Q4.1
LED4: Q5.1 U1.7 | length 5430.6
  Top Layer w8: v1(3080,3410) 3188.62,3301.38 U1.7 ; v1(3080,3505) 3080,3680 2865,3895 2883.47,3913.47 2927.2,3913.47 2952.47,3938.74 2952.47,4100.36 3022.12,4170 5200,4170 5256,4114 5256,2973.37 5245,2962.37 5245,2715 5135,2605 4968,2605 Q5.1
  Bottom Layer w8: v1(3080,3410) v1(3080,3505)
NCE: AS.6 R6.2 U1.21 | length 1560
  Top Layer w8: v1(2640,3005) 3285,3005 3305.79,3025.79 U1.21
  Bottom Layer w8: R6.2 2400,3250 2400,3095 2490,3005 v1(2640,3005)
  Bottom Layer w10: AS.6 2185,3355 2245,3295 R6.2
NCONFIG: AS.5 R4.2 S2.2 U1.14 | length 2543.2
  Top Layer w10: v1(2355,3420) 2465,3310 2465,3225 2550,3140 3201.67,3140 3225.25,3163.58 U1.14
  Bottom Layer w10: v1(2355,3420) 2335,3400 2090,3400 AS.5 1995,3405 1995,3590 2075,3670 2225,3670 2385,3830 S2.2@2385,4010
NCSO: AS.8 U1.8 U5.1 | length 1885.6
  Top Layer w8: AS.8 2240,3350 2240,3590 2320,3670 2655,3670 2805,3520 U5.1 2805,3355 2878.31,3281.69 U1.8
NetAS_7: AS.7 R5.2 | length 345.2
  Bottom Layer w10: AS.7 2050,3255 2100,3205 2320,3205 R5.2
NetC1_1: C1.1 C7.2 S1.6 U4.3 | length 1313.5
  Top Layer w40: S1.6 5505,3775 5595,3775 5665,3705 5665,3548.78 C1.1 ; C7.2 5615,3210 5845,3210 5900,3155 5900,3040 5814.45,2954.45 U4.3
NetD1_1: D1.1 P1.2 P1.3
NetD1_2: D1.2 P1.1 S1.4
NetD2_1: D2.1 R1.2
NetD4_2: D4.2 Q1.3
NetD6_2: D6.2 Q2.3
NetD7_2: D7.2 Q3.3
NetD8_2: D8.2 Q4.3
NetD9_2: D9.2 Q5.3
NetQ1_1: Q1.1 R14.2
NetQ1_2: Q1.2 R15.1
NetR2_1: R2.1 X1.3
NSTATUS: R12.1 U1.9 | length 488.9
  Top Layer w8: R12.1 3025,3230 3057.01,3262.01 U1.9
SYSCLK: R2.2 U1.23 | length 495.7
  Top Layer w8: R2.2 3016.42,2986.42 U1.23
TCK: JTAG.1 R10.1 U1.16 | length 1892.1
  Top Layer w8: v1(2355,2460) 2260,2555 2260,2745 2595,3080 3195,3080 3239.21,3124.21 U1.16
  Bottom Layer w10: JTAG.1 R10.1
TDI: JTAG.9 R8.1 U1.15 | length 1441.2
  Top Layer w8: v1(2345,2885) 2565,3105 3190.71,3105 3229.61,3143.9 U1.15
  Bottom Layer w10: JTAG.9 2335,2865 R8.1
TDO: JTAG.3 R9.1 U1.20 | length 1619.2
  Top Layer w8: v1(2355,2600) 2400,2645 2400,2820 2620,3040 3295,3040 3300.47,3045.47 U1.20
  Bottom Layer w10: JTAG.3 2315,2565 R9.1
TMS: JTAG.5 R7.1 U1.18 | length 1526.8
  Top Layer w8: v1(2350,2740) 2350,2795 2615,3060 3280,3060 3304.84,3084.84 U1.18
  Bottom Layer w10: JTAG.5 2280,2665 R7.1
pads on no net: JTAG.6 JTAG.7 JTAG.8 P1.4 P6.2 P6.4 P6.6 P6.8 P6.10 P6.12 P6.14 P6.16 P6.18 P6.20 P6.22 P6.23 P6.24 S1.1 S1.2 S1.3 S1.5 U2.4 U3.4 U4.4 X1.1
copper on no net:
  other v3: 6010,2265 6015,2455 6014.09,2660 6015,2910 6014.09,3045
  other v4: 6113.26,4165

## Polygon pours and split planes (outlines as drawn)
GND on Bottom Layer "Top Layer-No Net" (solid, pour order 12): 1831.25,4285 1831.25,1845 6265,1845 6265,4285
GND on Top Layer "Top Layer-No Net" (solid, pour order 14): 6265,4285 1831.25,4285 1831.25,1845 6265,1845

## Keep-outs
Keep-Out Layer:
  the board outline again, w47.24

## Other copper
Top Layer:
  rectangle: 5940,2140 6080,3120
  rectangle: 5970,3115 6060,3120
  rectangle net NetD7_2: 4965,2995 5100,3060
  rectangle net NetD1_1: 5850,3560 5930,3735
  rectangle net NetD1_2: 6085,3535 6165,3940
  rectangle net NetD1_2: 5930,3855 6160,3940
  rectangle net NetD1_1: 5850,3545 6045,3625
  rectangle net NetD1_1: 5975,3375 6045,3545
  rectangle net NetD1_1: 5995,3375 6165,3460
  rectangle net NetD1_2: 5545,3855 5930,3940
  rectangle net NetC1_1: 5520,3250 5580,3510
  rectangle net 3.3V: 5525,2905 5605,3155
  rectangle net 3.3V: 5560,3020 5815,3070
  rectangle net 2.5V: 5595,2635 5815,2685
  rectangle net 2.5V: 5540,2400 5625,2720
  rectangle net 1.2V: 5575,2240 5810,2290
  rectangle net 1.2V: 5540,2075 5625,2315
  rectangle net NetD2_1: 5815,3250 5995,3310
  rectangle net NetR2_1: 2750,2925 2910,2975
  rectangle net NetD9_2: 4965,2480 5105,2550
  rectangle net NetD8_2: 4965,2725 5105,2790
  rectangle net NetD6_2: 4965,3245 5105,3315
  rectangle net NetQ1_1: 5075,3465 5130,3600
  rectangle net NetQ1_2: 5075,3640 5130,3775
  rectangle net NetD4_2: 4900,3585 5055,3645
Bottom Layer:
  rectangle: 5940,2140 6080,3120
  rectangle net 3.3V: 2415,2580 2475,2910
  rectangle net 3.3V: 5545,2630 5620,2960
  rectangle net 2.5V: 5540,2260 5625,2500
  rectangle net GND: 3650,2875 4100,3275

## Silkscreen, mask and mechanical layers (free items; w line width, h text height)
Top Solder:
  rectangle: 5970,2195 6050,2970
Bottom Solder:
  rectangle: 5940,2140 6080,3120
  rectangle: 3650,2875 4100,3275